# Altium PCB FingerSensorPCBGood.PcbDoc
Units mil, origin at the board's own origin, x right, y up, seen from the top; angles counter-clockwise.
Board outline 1100 x 2300 mil, 2 copper layers (Top Layer, Bottom Layer); 8 components, 6 nets, 16 pads, 5 vias.
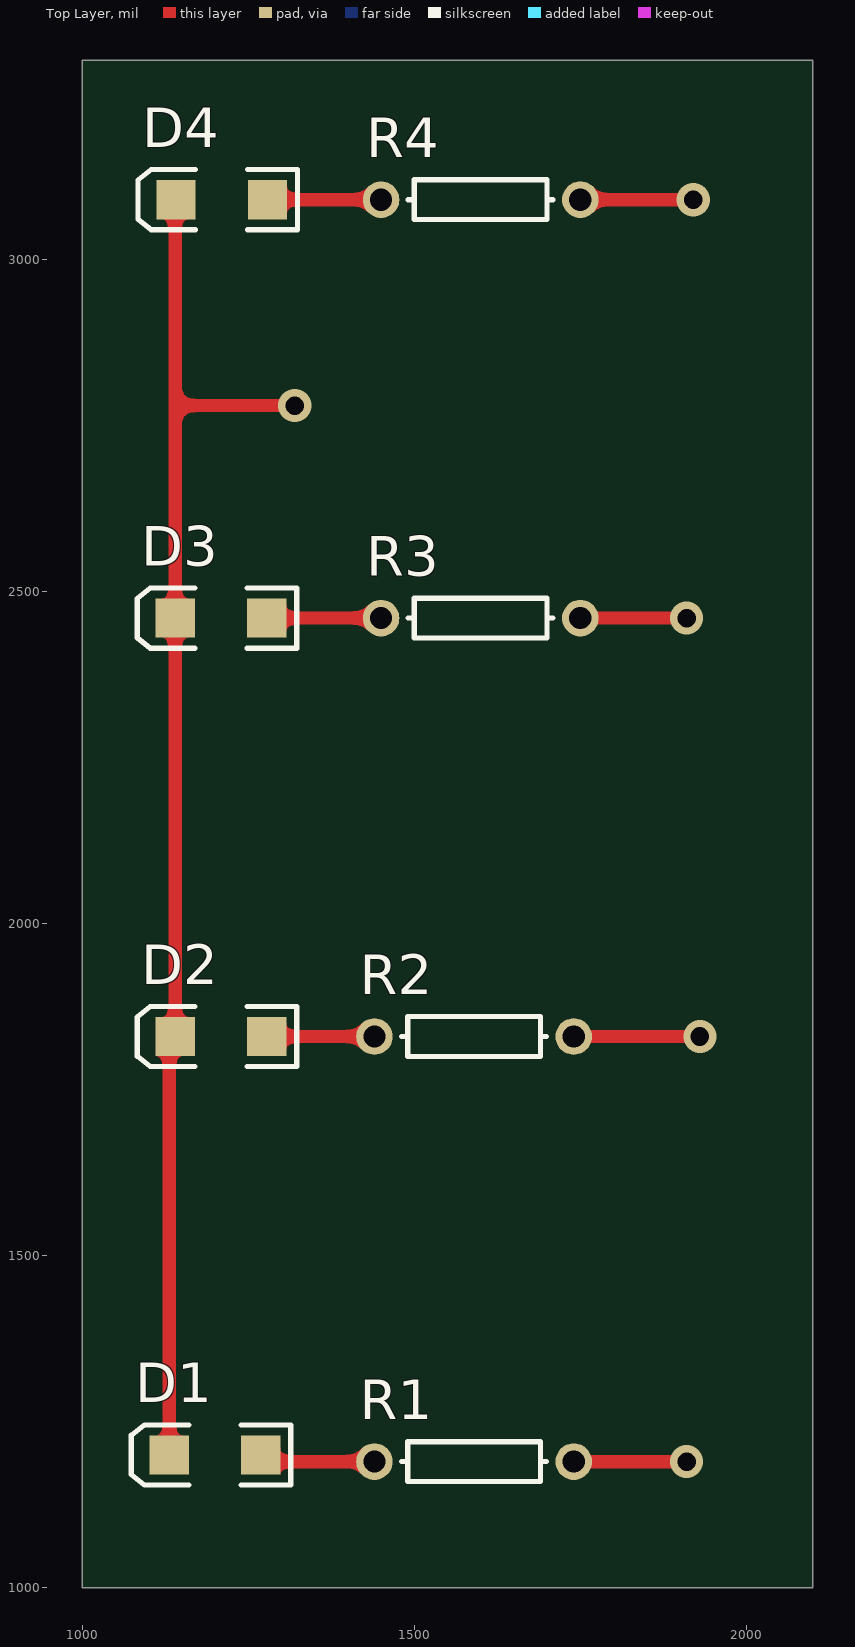
[diagram p0: Top Layer view]
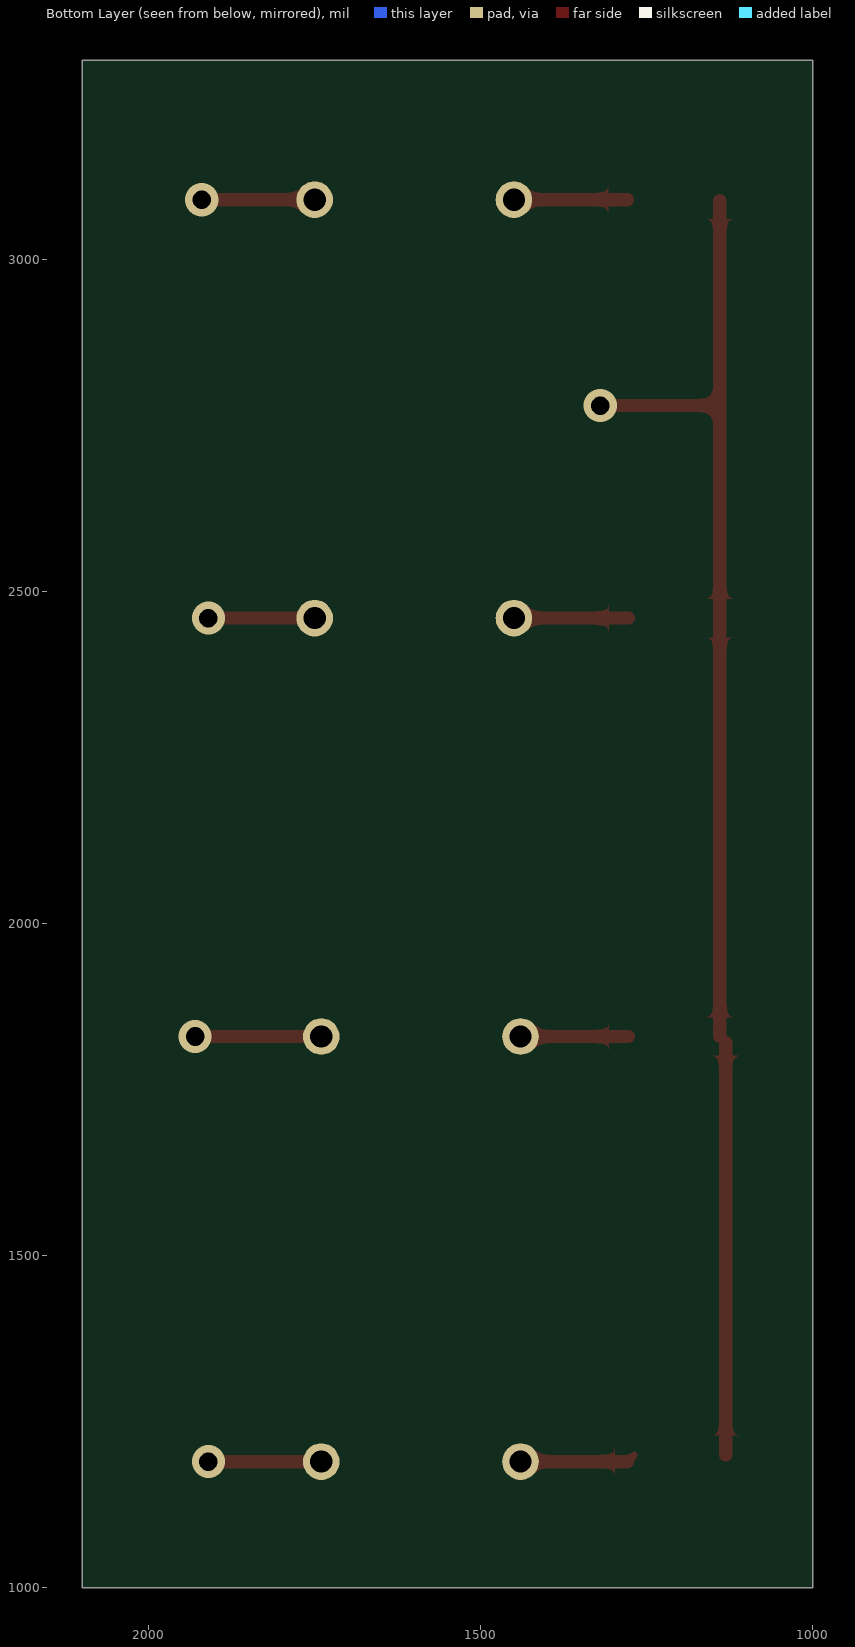
[diagram p1: Bottom Layer view, seen from below]

## Layer stack, top to bottom
Top Solder: solder mask 0.4, Solder Resist, Dk 3.5
Top Layer: signal copper 1.4
Dielectric 1: dielectric 12.6, FR-4, Dk 4.8
Bottom Layer: signal copper 1.4
Bottom Solder: solder mask 0.4, Solder Resist, Dk 3.5

## Board outline
1000,1000 2100,1000 2100,3300 1000,3300

## Design rules (kind name [scope] priority, off if disabled: settings)
Clearance [All] p1: gap=10 ignorepadtopadclearanceinfootprint=FALSE except(0: Arc-Hole Track-Hole SMDPad-Hole THPad-Hole Via-Hole Fill-Hole Poly-Hole Region-Hole Text-Hole)
PolygonConnect [All] p1: connectstyle=Relief reliefconductorwidth=10 reliefentries=4 polygonreliefangle="90 Angle" airgapwidth=10
RoomDefinition Schematic [InComponentClass('Schematic')] p1: confinementstyle=ConfineIn formatcopy=TRUE lockcomponents=FALSE outline 7050,1100 8400,1100 8400,1600 7050,1600
RoutingVias [All] p1: holewidth=28 width=50 viastyle="Through Hole" minholewidth=28 minwidth=50 maxholewidth=28 maxwidth=50
SolderMaskExpansion [All] p1: expansion=4
Width [All] p1: maxlimit=10 minlimit=10 preferedwidth=10
30 further rules are at their usual default settings.

## Components (designator, comment, footprint, x,y, rotation, side; value= is the part's Value field where it differs from the comment)
D1 "LED2" 3.2X1.6X1.1 1200,1200 r180 top
D2 "LED2" 3.2X1.6X1.1 1208.9,1830 r180 top
D3 "LED2" 3.2X1.6X1.1 1208.9,2460 r180 top
D4 "LED2" 3.2X1.6X1.1 1210,3090 r180 top
R1 "Res1" AXIAL-0.3 1590,1190 r180 top value=220
R2 "Res1" AXIAL-0.3 1590,1830 r180 top value=220
R3 "Res1" AXIAL-0.3 1600,2460 r180 top value=220
R4 "Res1" AXIAL-0.3 1600,3090 r180 top value=220

## Footprints (in the part's own frame and the unit in brackets; to place one, negate y for a bottom-side part, rotate by r counter-clockwise, add the part's x,y. Pads: shape width x height; smd on the part's side, far side on the other; paste and mask are expansions set on the pad)
3.2X1.6X1.1 [mm] "SMT LED; 2 Flat Leads"
  rect 1.5x1.5 smd: 1(-1.75,0) 2(1.75,0)
  silkscreen extent -2.9,-1.15 3.2,1.15
AXIAL-0.3 [mm] "Axial Device, Thru-Hole; 2 Leads; 0.3 in Pin Spacing"
  round 1.4 hole 0.85: 1(-3.81,0) 2(3.81,0)
  silkscreen extent -2.77,-0.76 2.77,0.76

## Part data
D1 D2 D3 D4: "Typical RED, GREEN, YELLOW, AMBER GaAs LED", LatestRevisionDate=17-Jul-2002, LatestRevisionNote="Re-released for DXP Platform.", PackageDescription="SM LED; 2 Flat Leads", PackageReference=3.2X1.6X1.1, PackageVersion=Feb-2002, Published=8-Jun-2000, Publisher="Altium Limited"
R1 R2 R3 R4: "Resistor", LatestRevisionDate=17-Jul-2002, LatestRevisionNote="Re-released for DXP Platform.", PackageDescription="Axial Device, Thru-Hole; 2 Leads; 0.3 in Pin Spacing", PackageReference=AXIAL-0.3, Published=8-Jun-2000, Publisher="Altium Limited"

## Via types
v1: diameter 50, hole 28, Top Layer to Bottom Layer, 5 vias

## Nets (pads, with @x,y where several pads share a name; then routed paths per layer and width w, separated by ;. In a path a pad name is that pad's centre, name@x,y a point inside that pad or via, vN(x,y) a via of type N, cw(c..) or ccw(c..) an arc to the next point about the centre after c; other vN are vias at no path point)
GND: D1.2 D2.2 D3.2 D4.2 | length 2054.1
  Top Layer w10: D2.2@1131.1,1821.1 D2.2 ; D4.2@1140,3088.9 D4.2
  Top Layer w20: D1.2 D2.2@1131.1,1821.1 ; D2.2 D3.2 1140,2780 ; D4.2@1140,3088.9 1140,2780 ; v1@1300,2780 1140,2780
  other v1: 1320,2780
NetD1_1: D1.1 R1.2 | length 175.2
  Top Layer w10: D1.1 D1.1@1278.9,1190
  Top Layer w20: D1.1@1278.9,1190 R1.2
NetD2_1: D2.1 R2.2 | length 162.2
  Top Layer w20: D2.1 R2.2
NetD3_1: D3.1 R3.2 | length 172.2
  Top Layer w20: D3.1 R3.2
NetD4_1: D4.1 R4.2 | length 171.1
  Top Layer w20: D4.1 R4.2
VCC: R1.1 R2.1 R3.1 R4.1 | length 650
  Top Layer w20: R1.1 v1@1890,1190 ; R2.1 v1@1910,1830 ; R3.1 v1(1910,2460) ; R4.1 v1(1920,3090)
  other v1: 1910,1190 1930,1830

## Silkscreen, mask and mechanical layers (free items; w line width, h text height)
Mechanical 1:
  the board outline again, w10